# Altium PCB PCB_L0.PcbDoc (part 2 of 2)
Units mm, origin at the board's own origin, x right, y up, seen from the top; angles counter-clockwise.
Board outline 110 x 165 mm, 2 copper layers (Top Layer, Bottom Layer), stack 1.57 mm thick; 80 components, 155 nets, 574 pads, 75 vias.
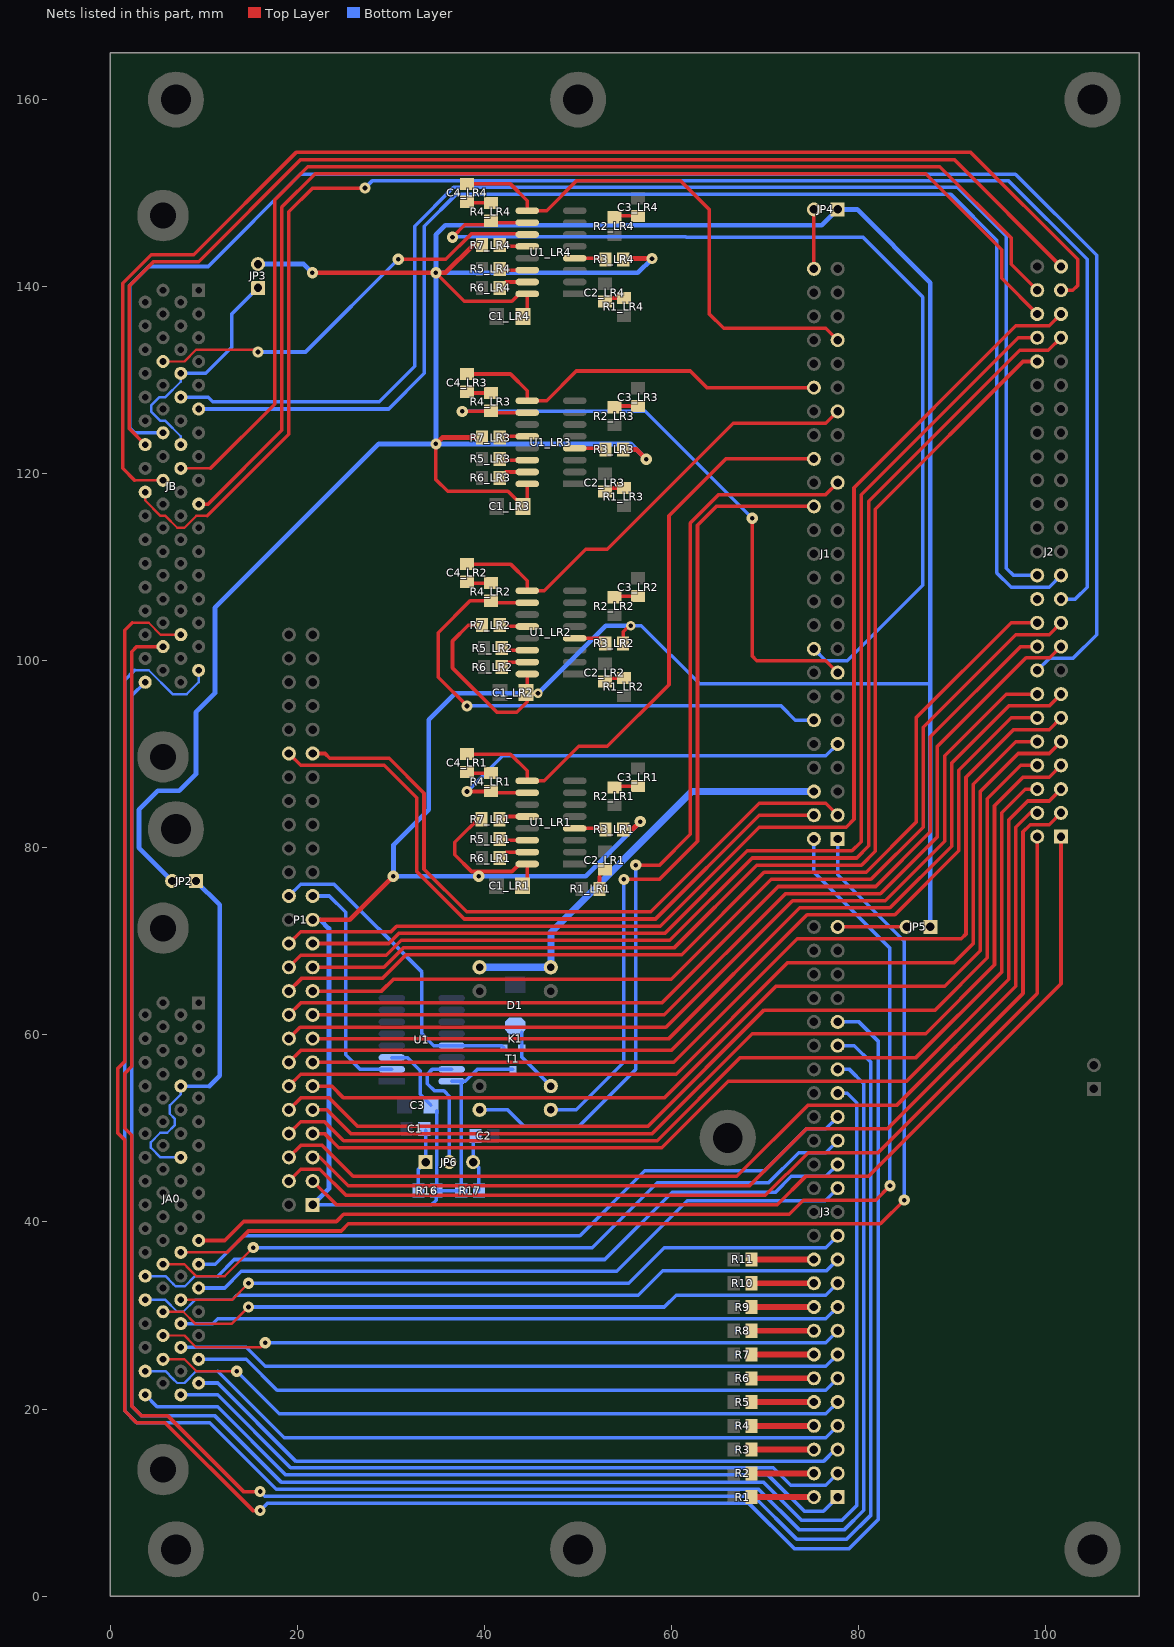
[diagram p2: the nets of this part, all layers, seen from the top]

## Via types
v1: diameter 1.2, hole 0.5, Top Layer to Bottom Layer, 71 vias
v2: diameter 1, hole 0.5, Top Layer to Bottom Layer, 2 vias
v3: diameter 1.2, hole 0.5, Top Layer to Bottom Layer, tented top, 1 vias
v4: diameter 1.2, hole 0.5, Top Layer to Bottom Layer, tented bottom, 1 vias

## Nets (pads, with @x,y where several pads share a name; then routed paths per layer and width w, separated by ;. In a path a pad name is that pad's centre, name@x,y a point inside that pad or via, vN(x,y) a via of type N, cw(c..) or ccw(c..) an arc to the next point about the centre after c; other vN are vias at no path point) (continued)
ENC_I4: JB.41 U1_LR4.11 | length 44.7
  Top Layer w0.254: JB.41@5.62,132 7.901,132 9.171,133.27 v1@15.78,133.27
  Top Layer w0.381: v1(30.766,142.922) 35.846,142.922 38.564,145.641 44.505,145.641 U1_LR4.11@44.564,145.582
  Bottom Layer w0.381: v1(15.78,133.016) 20.86,133.016 v1(30.766,142.922)
ENC_I+1: J1.9 R4_LR1.2 U1_LR1.10 | length 47.9
  Top Layer w0.381: v1(38.132,86.026) R4_LR1.2@40.606,86.026 ; R4_LR1.2@40.872,85.892 U1_LR1.10@44.564,85.892
  Bottom Layer w0.381: v1(38.132,86.026) 41.942,89.836 76.486,89.836 J1.9@77.756,91.106
ENC_I+2: J1.12 R4_LR2.2 U1_LR2.10 | length 57.6
  Top Layer w0.381: v1(38.132,95.17) 35.052,98.25 35.052,103.012 38.452,106.412 R4_LR2.2@40.672,106.412 ; R4_LR2.2@40.872,106.212 U1_LR2.10@44.564,106.212
  Bottom Layer w0.381: v1(38.132,95.17) 71.708,95.17 73.232,93.646 J1.12@75.216,93.646
ENC_I+3: J1.15 R4_LR3.2 U1_LR3.10 | length 67
  Top Layer w0.381: v1(37.624,126.666) R4_LR3.2@40.606,126.666 ; R4_LR3.2@40.872,126.532 U1_LR3.10@44.564,126.532 ; v1(68.612,115.236) 68.612,100.504 69.12,99.996 76.486,99.996 J1.15@77.756,98.726
  Bottom Layer w0.381: v1(37.624,126.666) 57.182,126.666 v1(68.612,115.236)
ENC_I+4: J1.18 R4_LR4.2 U1_LR4.10 | length 107.2
  Top Layer w0.381: v1(36.576,145.288) 37.895,146.607 R4_LR4.2@40.227,146.607 ; R4_LR4.2@40.872,146.852 U1_LR4.10@44.564,146.852
  Bottom Layer w0.381: v1@36.576,145.317 61.528,145.317 61.556,145.288 80.47,145.288 86.868,138.89 86.868,108.092 78.772,99.996 76.486,99.996 J1.18@75.216,101.266
ENC_I-1: C4_LR1.1 J1.34 U1_LR1.9 | length 63.7
  Top Layer w0.381: C4_LR1.1@38.132,90.024 42.77,90.024 44.564,88.23 U1_LR1.9@44.564,87.162 46.38,87.162 50.07,90.852 53.118,90.852 59.722,97.456 59.722,115.49 65.818,121.586 J1.34@75.216,121.586
ENC_I-2: C4_LR2.1 J1.37 U1_LR2.9 | length 49.4
  Top Layer w0.381: C4_LR2.1@38.132,110.344 42.77,110.344 44.564,108.55 U1_LR2.9@44.564,107.482 46.38,107.482 50.832,111.934 53.118,111.934 66.58,125.396 76.486,125.396 J1.37@77.756,126.666
ENC_I-3: C4_LR3.1 J1.40 U1_LR3.9 | length 40.9
  Top Layer w0.381: C4_LR3.1@38.132,130.664 42.77,130.664 44.564,128.87 U1_LR3.9@44.564,127.802 46.634,127.802 49.816,130.984 62.008,130.984 63.786,129.206 J1.40@75.216,129.206
ENC_I-4: C4_LR4.1 J1.43 U1_LR4.9 | length 56.3
  Top Layer w0.381: C4_LR4.1@38.132,150.984 42.77,150.984 44.564,149.19 U1_LR4.9@44.564,148.122 46.634,148.122 49.816,151.304 60.992,151.304 64.04,148.256 64.04,137.08 65.564,135.556 76.486,135.556 J1.43@77.756,134.286
ENDSW+_1: J2.5 P1.7 | length 106.5
  Top Layer w0.381: P1.7@21.622,49.45 22.892,49.45 24.416,47.926 58.96,47.926 66.072,55.038 85.122,55.038 96.044,65.96 96.044,82.978 98.076,85.01 100.362,85.01 J2.5@101.632,86.28
ENDSW+_2: J2.7 P1.9 | length 107.3
  Top Layer w0.381: P1.9@21.622,51.99 23.146,51.99 25.686,49.45 57.944,49.45 68.612,60.118 87.154,60.118 94.52,67.484 94.52,84.502 97.568,87.55 100.362,87.55 J2.7@101.632,88.82
ENDSW+_3: J2.9 P1.11 | length 106.3
  Top Layer w0.381: P1.11@21.622,54.53 23.654,54.53 24.924,53.26 59.214,53.26 71.152,65.198 89.186,65.198 92.996,69.008 92.996,86.026 97.06,90.09 100.362,90.09 J2.9@101.632,91.36
ENDSW+_4: J2.11 P1.13 | length 105.1
  Top Layer w0.381: P1.13@21.622,57.07 60.23,57.07 73.438,70.278 90.964,70.278 91.472,70.786 91.472,87.55 96.552,92.63 100.362,92.63 J2.11@101.632,93.9
ENDSW-_1: J2.6 P1.8 | length 106.9
  Top Layer w0.381: P1.8@19.082,49.45 20.352,50.72 22.892,50.72 24.924,48.688 58.452,48.688 67.342,57.578 86.138,57.578 95.282,66.722 95.282,83.74 97.822,86.28 J2.6@99.092,86.28
ENDSW-_2: J2.8 P1.10 | length 107.8
  Top Layer w0.381: P1.10@19.082,51.99 20.352,53.26 23.4,53.26 26.448,50.212 57.436,50.212 69.882,62.658 88.17,62.658 93.758,68.246 93.758,85.264 97.314,88.82 J2.8@99.092,88.82
ENDSW-_3: J2.10 P1.12 | length 105.2
  Top Layer w0.381: P1.12@19.082,54.53 20.352,55.8 60.484,55.8 72.422,67.738 90.202,67.738 92.234,69.77 92.234,86.788 96.806,91.36 J2.10@99.092,91.36
ENDSW-_4: J2.12 P1.14 | length 100.3
  Top Layer w0.381: P1.14@19.082,57.07 20.352,58.34 59.976,58.34 74.481,72.845 83.879,72.845 90.71,79.676 90.71,88.312 96.298,93.9 J2.12@99.092,93.9
ENSD_1: J2.17 P1.17 | length 102
  Top Layer w0.381: P1.17@21.622,62.15 59.214,62.15 72.168,75.104 82.328,75.104 88.424,81.2 88.424,90.852 97.897,100.325 100.437,100.325 J2.17@101.632,101.52
ENSD_2: J2.18 P1.18 | length 102.3
  Top Layer w0.381: P1.18@19.082,62.15 20.352,63.42 58.96,63.42 71.406,75.866 81.82,75.866 87.662,81.708 87.662,91.868 97.314,101.52 J2.18@99.092,101.52
ENSD_3: J2.19 P1.19 | length 102.6
  Top Layer w0.381: P1.19@21.622,64.69 28.988,64.69 30.258,65.96 59.976,65.96 70.644,76.628 81.312,76.628 86.9,82.216 86.9,92.884 96.806,102.79 100.362,102.79 J2.19@101.632,104.06
ENSD_4: J2.20 P1.20 | length 102.9
  Top Layer w0.381: P1.20@19.082,64.69 20.427,66.035 29.063,66.035 31.608,68.58 61.072,68.58 69.882,77.39 80.804,77.39 86.138,82.724 86.138,93.9 96.298,104.06 J2.20@99.092,104.06
FX: J3.1 JA0.68 | length 79.8
  Bottom Layer w0.381: JA0.68@3.715,21.51 4.985,20.24 11.462,20.24 18.748,12.954 70.31,12.954 74.2,9.064 76.232,9.064 J3.1@77.756,10.588
FY: J3.5 JA0.33 | length 72.3
  Bottom Layer w0.381: JA0.33@9.43,22.78 11.462,22.78 19.844,14.398 76.232,14.398 77.502,15.668 J3.5@77.756,15.668
FZ: J3.9 JA0.65 | length 75.1
  Top Layer w0.254: JA0.65@5.62,25.32 7.901,25.32 9.171,24.05 v1(13.494,24.05)
  Bottom Layer w0.381: v1(13.494,24.05) 18.066,19.478 76.486,19.478 J3.9@77.756,20.748
GRIPPER_CLOSE: J2.14 P1.16 | length 100.6
  Top Layer w0.381: P1.16@19.082,59.61 20.276,60.805 59.392,60.805 72.93,74.342 82.836,74.342 89.186,80.692 89.186,89.836 95.79,96.44 J2.14@99.092,96.44
GRIPPER_OPEN: J2.13 P1.15 | length 100.5
  Top Layer w0.381: P1.15@21.622,59.61 59.722,59.61 73.692,73.58 83.344,73.58 89.948,80.184 89.948,89.074 96.044,95.17 100.362,95.17 J2.13@101.632,96.44
HAL1: J3.35 JB.68 | length 206.7
  Bottom Layer w0.381: JB.68@3.715,97.71 2.286,96.281 2.286,20.32 3.302,19.304 11.128,19.304 18.24,12.192 69.802,12.192 73.866,8.128 78.232,8.128 79.788,9.684 79.788,52.752 78.772,53.768 J3.35@77.756,53.768
HAL2: J3.37 JB.33 | length 223.5
  Bottom Layer w0.254: 2.572,98.98 4.091,98.98 6.631,96.44 8.16,96.44 9.43,97.71 JB.33@9.43,98.98
  Bottom Layer w0.381: 2.572,98.98 1.524,97.932 1.524,19.812 2.794,18.542 10.62,18.542 17.732,11.43 69.294,11.43 73.612,7.112 78.486,7.112 80.55,9.176 80.55,54.784 79.026,56.308 J3.37@77.756,56.308
HAL3: J3.39 JB.65 | length 223.5
  Top Layer w0.381: JB.65@5.62,101.52 2.826,101.52 2.286,100.98 2.286,56.642 1.524,55.88 1.524,50.038 2.286,49.276 2.286,20.32 3.302,19.304 6.096,19.304 14.224,11.176 v1(16.002,11.176)
  Bottom Layer w0.381: v1(16.002,11.176) 16.51,10.668 68.786,10.668 73.358,6.096 78.74,6.096 81.312,8.668 81.312,57.07 79.534,58.848 J3.39@77.756,58.848
HAL4: J3.41 JB.30 | length 235.9
  Top Layer w0.254: 2.318,104.06 4.091,104.06 5.361,102.79 JB.30@7.525,102.79
  Top Layer w0.381: 2.318,104.06 1.524,103.266 1.524,57.15 0.762,56.388 0.762,49.53 1.524,48.768 1.524,19.812 2.794,18.542 5.842,18.542 15.24,9.144 v1(16.002,9.144)
  Bottom Layer w0.381: v1(16.002,9.144) 16.764,9.906 68.278,9.906 73.104,5.08 78.994,5.08 82.074,8.16 82.074,59.356 80.042,61.388 J3.41@77.756,61.388
NetC1_2: C1.2 JP6.1 R16.1 | length 6.8
  Bottom Layer w0.381: R16.1@32.93,43.354 32.93,45.64 JP6.1@33.692,46.402 C1.2@33.692,49.826
NetC2_2: C2.2 JP6.3 R17.1 | length 5.6
  Bottom Layer w0.381: C2.2@38.772,48.688 JP6.3@38.772,46.402 39.402,45.772 R17.1@39.402,43.354
NetC2_LR1_2: C2_LR1.2 R1_LR1.1 | length 1.5
  Top Layer w0.381: R1_LR1.1@52.29,75.358 52.29,76.882
NetC2_LR2_2: C2_LR2.2 R1_LR2.1 | length 1.7
  Top Layer w0.381: C2_LR2.2@53.24,98.152 R1_LR2.1@54.896,98.152
NetC2_LR3_2: C2_LR3.2 R1_LR3.1 | length 1.7
  Top Layer w0.381: C2_LR3.2@53.24,118.472 R1_LR3.1@54.896,118.472
NetC2_LR4_2: C2_LR4.2 R1_LR4.1 | length 1.7
  Top Layer w0.381: C2_LR4.2@53.24,138.792 R1_LR4.1@54.896,138.792
NetC3_LR1_2: C3_LR1.2 R2_LR1.1 | length 2.4
  Top Layer w0.381: R2_LR1.1@54.012,86.6 C3_LR1.2@56.42,86.6
NetC3_LR2_2: C3_LR2.2 R2_LR2.1 | length 2.4
  Top Layer w0.381: R2_LR2.1@54.012,106.92 C3_LR2.2@56.42,106.92
NetC3_LR3_2: C3_LR3.2 R2_LR3.1 | length 2.4
  Top Layer w0.381: R2_LR3.1@54.012,127.24 C3_LR3.2@56.42,127.24
NetC3_LR4_2: C3_LR4.2 R2_LR4.1 | length 2.4
  Top Layer w0.381: R2_LR4.1@54.012,147.56 C3_LR4.2@56.42,147.56
NetC4_LR1_2: C4_LR1.2 R4_LR1.1 | length 2.4
  Top Layer w0.381: C4_LR1.2@38.264,87.992 R4_LR1.1@40.672,87.992
NetC4_LR2_2: C4_LR2.2 R4_LR2.1 | length 2.4
  Top Layer w0.381: C4_LR2.2@38.264,108.312 R4_LR2.1@40.672,108.312
NetC4_LR3_2: C4_LR3.2 R4_LR3.1 | length 2.4
  Top Layer w0.381: C4_LR3.2@38.264,128.632 R4_LR3.1@40.672,128.632
NetC4_LR4_2: C4_LR4.2 R4_LR4.1 | length 2.4
  Top Layer w0.381: C4_LR4.2@38.264,148.952 R4_LR4.1@40.672,148.952
NetD1_1: D1.1 K1.2 T1.2 | length 7
  Bottom Layer w0.381: D1.1@43.977,60.267 T1.2@43.977,58.598 43.977,57.641 K1.2@47.088,54.53
NetJ1_50: J1.50 JP4.2 | length 6.3
  Top Layer w0.381: J1.50@75.216,141.906 JP4.2@75.216,148.256
NetJ3_2: J3.2 R1.1 | length 6.7
  Top Layer w0.635: R1.1@68.546,10.588 J3.2@75.216,10.588
NetJ3_4: J3.4 R2.1 | length 6.7
  Top Layer w0.635: R2.1@68.546,13.128 J3.4@75.216,13.128
NetJ3_6: J3.6 R3.1 | length 6.7
  Top Layer w0.635: R3.1@68.546,15.668 J3.6@75.216,15.668
NetJ3_8: J3.8 R4.1 | length 6.7
  Top Layer w0.635: R4.1@68.546,18.208 J3.8@75.216,18.208
NetJ3_10: J3.10 R5.1 | length 6.7
  Top Layer w0.635: R5.1@68.546,20.748 J3.10@75.216,20.748
NetJ3_12: J3.12 R6.1 | length 6.7
  Top Layer w0.635: R6.1@68.546,23.288 J3.12@75.216,23.288
NetJ3_14: J3.14 R7.1 | length 6.7
  Top Layer w0.635: R7.1@68.546,25.828 J3.14@75.216,25.828
NetJ3_16: J3.16 R8.1 | length 6.7
  Top Layer w0.635: R8.1@68.546,28.368 J3.16@75.216,28.368
NetJ3_18: J3.18 R9.1 | length 6.7
  Top Layer w0.635: R9.1@68.546,30.908 J3.18@75.216,30.908
NetJ3_20: J3.20 R10.1 | length 6.7
  Top Layer w0.635: R10.1@68.546,33.448 J3.20@75.216,33.448
NetJ3_22: J3.22 R11.1 | length 6.7
  Top Layer w0.635: R11.1@68.546,35.988 J3.22@75.216,35.988
NetJ3_49: J3.49 JP5.2 | length 7.4
  Top Layer w0.381: J3.49@77.756,71.548 JP5.2@85.122,71.548
NetJA0_8: JA0.8 JA0.14 JP2.1 | length 38.9
  Bottom Layer w0.254: JA0.14@7.525,46.91 5.361,46.91 4.318,47.953 4.318,48.514 5.334,49.53 6.076,49.53 6.858,50.312 6.858,51.054 6.35,51.562 6.35,52.461 7.525,53.636 JA0.8@7.525,54.53
  Bottom Layer w0.381: JA0.8@7.525,54.53 10.588,54.53
  Bottom Layer w0.508: JP2.1@9.144,76.454 11.684,73.914 11.684,55.626 10.588,54.53
NetJB_8: JB.8 JB.14 JP3.1 | length 25.1
  Bottom Layer w0.254: JB.14@7.525,123.11 7.525,124.004 5.879,125.65 5.361,125.65 4.35,126.661 4.35,127.296 5.244,128.19 5.879,128.19 7.525,129.836 JB.8@7.525,130.73
  Bottom Layer w0.381: JB.8@7.525,130.73 10.192,130.73 12.986,133.524 12.986,137.08 JP3.1@15.78,139.874
NetJP6_2: JP6.2 U1.15 | length 13.8
  Bottom Layer w0.381: JP6.2@36.232,46.402 36.232,53.448 35.658,54.022 34.642,54.022 33.88,54.784 33.88,55.8 34.388,56.308 U1.15@36.486,56.308
NetR3_LR1_1: R3_LR1.1 U1_LR1.4 | length 3.2
  Top Layer w0.381: U1_LR1.4@49.644,82.082 R3_LR1.1@52.81,82.082
NetR3_LR2_1: R3_LR2.1 U1_LR2.4 | length 3.2
  Top Layer w0.381: U1_LR2.4@49.644,102.402 R3_LR2.1@52.81,102.402
NetR3_LR3_1: R3_LR3.1 U1_LR3.4 | length 3.2
  Top Layer w0.381: U1_LR3.4@49.644,122.722 R3_LR3.1@52.81,122.722
NetR3_LR4_1: R3_LR4.1 U1_LR4.4 | length 3.2
  Top Layer w0.381: U1_LR4.4@49.644,143.042 R3_LR4.1@52.81,143.042
NetR5_LR1_1: R5_LR1.1 U1_LR1.14 | length 2.7
  Top Layer w0.381: R5_LR1.1@41.822,80.812 U1_LR1.14@44.564,80.812
NetR5_LR2_1: R5_LR2.1 U1_LR2.14 | length 2.7
  Top Layer w0.381: R5_LR2.1@41.822,101.132 U1_LR2.14@44.564,101.132
NetR5_LR3_1: R5_LR3.1 U1_LR3.14 | length 2.7
  Top Layer w0.381: R5_LR3.1@41.822,121.452 U1_LR3.14@44.564,121.452
NetR5_LR4_1: R5_LR4.1 U1_LR4.14 | length 2.7
  Top Layer w0.381: R5_LR4.1@41.822,141.772 U1_LR4.14@44.564,141.772
NetR6_LR1_1: R6_LR1.1 U1_LR1.15 | length 2.3
  Top Layer w0.381: R6_LR1.1@42.25,79.542 U1_LR1.15@44.564,79.542
NetR6_LR2_1: R6_LR2.1 U1_LR2.15 | length 2.3
  Top Layer w0.381: R6_LR2.1@42.25,99.862 U1_LR2.15@44.564,99.862
NetR6_LR3_1: R6_LR3.1 U1_LR3.15 | length 2.3
  Top Layer w0.381: R6_LR3.1@42.25,120.182 U1_LR3.15@44.564,120.182
NetR6_LR4_1: R6_LR4.1 U1_LR4.15 | length 2.3
  Top Layer w0.381: R6_LR4.1@42.25,140.502 U1_LR4.15@44.564,140.502
NetR7_LR1_1: R7_LR1.1 U1_LR1.12 | length 2.8
  Top Layer w0.381: R7_LR1.1@41.756,83.352 U1_LR1.12@44.564,83.352
NetR7_LR2_1: R7_LR2.1 U1_LR2.12 | length 2.8
  Top Layer w0.381: R7_LR2.1@41.756,103.672 U1_LR2.12@44.564,103.672
NetR7_LR3_1: R7_LR3.1 U1_LR3.12 | length 2.8
  Top Layer w0.381: R7_LR3.1@41.756,123.992 U1_LR3.12@44.564,123.992
NetR7_LR4_1: R7_LR4.1 U1_LR4.12 | length 2.8
  Top Layer w0.381: R7_LR4.1@41.756,144.312 U1_LR4.12@44.564,144.312
RAI_A1: J3.27 JA0.25 | length 72.7
  Bottom Layer w0.381: JA0.25@9.43,32.94 12.224,32.94 14.002,34.718 54.134,34.718 61.678,42.263 76.41,42.263 J3.27@77.756,43.608
RAI_A2: J3.31 JA0.57 | length 78.7
  Top Layer w0.254: JA0.57@5.62,35.48 7.906,35.48 8.349,35.037 8.349,35.032 8.982,34.399 8.987,34.399 9.176,34.21 12.224,34.21 v1(15.272,37.258)
  Bottom Layer w0.381: v1(15.272,37.258) 51.53,37.258 58.468,44.196 70.358,44.196 73.58,47.418 76.486,47.418 J3.31@77.756,48.688
RAI_A3: J3.3 JA0.34 | length 74.8
  Bottom Layer w0.381: JA0.34@7.525,21.51 11.462,21.51 19.256,13.716 70.866,13.716 72.724,11.858 76.486,11.858 J3.3@77.756,13.128
RAI_A4: J3.7 JA0.66 | length 78.6
  Bottom Layer w0.254: JA0.66@3.715,24.05 5.879,24.05 6.701,23.228 6.701,23.223 7.144,22.78 7.901,22.78 9.176,24.055 11.462,24.055
  Bottom Layer w0.381: 11.462,24.05 18.574,16.938 76.486,16.938 J3.7@77.756,18.208
RAI_A5: J3.11 JA0.31 | length 70.2
  Bottom Layer w0.381: JA0.31@9.43,25.32 14.51,25.32 17.812,22.018 76.486,22.018 J3.11@77.756,23.288
RAI_A6: J3.15 JA0.63 | length 73.4
  Top Layer w0.254: JA0.63@5.62,27.86 7.906,27.86 8.349,27.417 8.349,27.412 9.171,26.59 16.034,26.59 v1(16.542,27.098)
  Bottom Layer w0.381: v1(16.542,27.098) 76.486,27.098 J3.15@77.756,28.368
RAI_A7: J3.19 JA0.61 | length 74.5
  Top Layer w0.254: JA0.61@5.62,30.4 7.784,30.4 9.054,29.13 12.986,29.13 v1(14.764,30.908)
  Bottom Layer w0.381: v1(14.764,30.908) 59.214,30.908 60.484,32.178 76.486,32.178 J3.19@77.756,33.448
RAI_A8: J3.23 JA0.26 | length 73.1
  Top Layer w0.254: JA0.26@7.525,31.67 12.986,31.67 v1(14.764,33.448)
  Bottom Layer w0.381: v1(14.764,33.448) 55.404,33.448 59.214,37.258 76.486,37.258 J3.23@77.756,38.528
RAI_A9: J3.29 JA0.58 | length 79.9
  Bottom Layer w0.254: JA0.58@3.715,34.21 5.879,34.21 6.701,33.388 6.701,33.383 6.955,33.129 7.973,33.129 9.054,34.21 11.462,34.21
  Bottom Layer w0.381: 11.462,34.21 13.24,35.988 52.864,35.988 60.056,43.18 71.105,43.18 72.803,44.878 76.486,44.878 J3.29@77.756,46.148
RAI_A10: J3.33 JA0.23 | length 74.8
  Bottom Layer w0.381: JA0.23@9.43,35.48 11.208,35.48 14.256,38.528 50.197,38.528 57.135,45.466 69.93,45.466 74.422,49.958 76.486,49.958 J3.33@77.756,51.228
RDI_1: J2.47 JB.51 | length 142.1
  Top Layer w0.254: 2.572,119.3 JB.51@5.62,119.3
  Top Layer w0.381: 2.572,119.3 1.302,120.57 1.302,140.382 4.35,143.43 8.922,143.43 19.844,154.352 91.98,154.352 103.41,142.922 103.41,140.128 102.902,139.62 J2.47@101.632,139.62
RDI_2: J2.48 JB.16 | length 124.8
  Top Layer w0.254: JB.16@7.525,120.57 10.7,120.57
  Top Layer w0.381: 10.7,120.57 17.558,127.428 17.558,149.272 21.114,152.828 88.678,152.828 96.298,145.208 96.298,142.414 J2.48@99.092,139.62
RDI_3: J2.49 JB.48 | length 127.6
  Top Layer w0.381: JB.48@3.715,123.11 2.032,124.793 2.032,140.096 4.604,142.668 9.43,142.668 20.352,153.59 90.202,153.59 J2.49@101.632,142.16
RDO_1: J2.21 JB.52 | length 173.9
  Top Layer w0.254: JB.52@3.715,118.03 3.715,117.136 5.361,115.49 5.879,115.49 7.149,114.22 7.901,114.22 9.171,115.49 10.334,115.49
  Top Layer w0.381: 10.334,115.49 19.082,124.238 19.082,148.002 21.622,150.542 v1(27.21,150.542)
  Bottom Layer w0.381: v1(27.21,150.542) 27.972,151.304 96.044,151.304 104.426,142.922 104.426,107.87 103.156,106.6 J2.21@101.632,106.6
RDO_2: J2.22
RDO_3: J2.23 JB.11 | length 149.7
  Bottom Layer w0.381: JB.11@9.43,126.92 29.75,126.92 33.56,130.73 33.56,146.478 36.942,149.86 89.868,149.86 94.774,144.954 94.774,109.394 96.298,107.87 100.362,107.87 J2.23@101.632,109.14
RDO_4: J2.24 JB.10 | length 148
  Bottom Layer w0.381: JB.10@7.525,128.19 10.446,128.19 10.954,127.682 28.734,127.682 32.544,131.492 32.544,146.478 36.688,150.622 90.543,150.622 95.79,145.375 95.79,109.902 96.552,109.14 J2.24@99.092,109.14
READY_1: J2.1 P1.3 | length 106.6
  Top Layer w0.381: P1.3@21.622,44.37 24.162,41.83 71.294,41.83 74.371,44.907 81.087,44.907 101.632,65.452 J2.1@101.632,81.2
READY_2: J2.2 P1.4 | length 107.4
  Top Layer w0.381: P1.4@19.082,44.37 20.352,45.64 22.384,45.64 25.178,42.846 70.024,42.846 74.596,47.418 82.074,47.418 99.092,64.436 J2.2@99.092,81.2
READY_3: J2.3 P1.5 | length 107.9
  Top Layer w0.381: P1.5@21.622,46.91 22.366,46.91 25.414,43.862 68.326,43.862 74.422,49.958 83.09,49.958 97.568,64.436 97.568,81.708 98.33,82.47 100.362,82.47 J2.3@101.632,83.74
READY_4: J2.4 P1.6 | length 108
  Top Layer w0.381: P1.6@19.082,46.91 20.352,48.18 22.638,48.18 25.94,44.878 66.976,44.878 74.596,52.498 84.106,52.498 96.806,65.198 96.806,82.216 98.33,83.74 J2.4@99.092,83.74
ROD: J2.46 JB.19 | length 126.5
  Top Layer w0.381: JB.19@9.43,116.76 10.446,116.76 18.32,124.634 18.32,148.51 21.888,152.078 79.267,152.078 79.28,152.066 ; 79.026,152.066 79.28,152.066 ; J2.46@99.092,137.08 95.282,140.89 95.282,143.938 87.154,152.066 79.28,152.066
SDCC_1: J2.42 P1.21 | length 125.7
  Top Layer w0.381: P1.21@21.622,67.23 29.242,67.23 31.354,69.342 60.31,69.342 69.12,78.152 80.296,78.152 81.788,79.644 81.788,116.22 97.568,132 J2.42@99.092,132
SDCC_2: J2.43 P1.22 | length 132
  Top Layer w0.381: P1.22@19.082,67.23 20.352,68.5 29.496,68.5 31.1,70.104 59.802,70.104 68.612,78.914 79.788,78.914 81.086,80.212 81.086,117.042 97.238,133.195 100.286,133.195 J2.43@101.632,134.54
SDCC_3: J2.44 P1.23 | length 126
  Top Layer w0.381: P1.23@21.622,69.77 29.75,69.77 30.846,70.866 59.294,70.866 68.104,79.676 79.28,79.676 80.264,80.66 80.264,117.744 97.06,134.54 J2.44@99.092,134.54
SDCC_4: J2.45 P1.24 | length 131.2
  Top Layer w0.381: P1.24@19.082,69.77 20.352,71.04 30.004,71.04 30.592,71.628 58.786,71.628 69.374,82.216 78.66,82.216 79.502,83.058 79.502,118.506 96.806,135.81 100.362,135.81 J2.45@101.632,137.08
SETVAL1: J1.1 JA0.22 | length 121.2
  Top Layer w0.254: JA0.22@7.525,36.75 12.478,36.75
  Top Layer w0.381: 12.478,36.75 14.764,39.036 24.67,39.036 25.432,39.798 82.328,39.798 v1(84.868,42.338)
  Bottom Layer w0.381: J1.1@77.756,80.946 77.756,77.136 84.868,70.024 v1(84.868,42.338)
SETVAL2: J1.2 JA0.21 | length 116.8
  Top Layer w0.381: JA0.21@9.43,38.02 12.224,38.02 14.256,40.052 24.162,40.052 24.924,40.814 72.564,40.814 74.088,42.338 81.82,42.338 v1(83.344,43.862)
  Bottom Layer w0.381: J1.2@75.216,80.946 75.216,77.39 83.344,69.262 v1(83.344,43.862)
SETVAL3: J1.3 P1.39 | length 73.2
  Top Layer w0.381: P1.39@21.622,90.09 22.94,90.09 23.456,89.574 29.806,89.574 33.528,85.852 33.528,77.724 38.1,73.152 57.77,73.152 69.374,84.756 76.486,84.756 J1.3@77.756,83.486
SETVAL4: J1.4 P1.40 | length 72.7
  Top Layer w0.381: P1.40@19.082,90.09 20.352,88.82 29.29,88.82 32.766,85.344 32.766,77.47 37.846,72.39 58.278,72.39 69.374,83.486 J1.4@75.216,83.486
TX: J3.13 JA0.30 | length 71.6
  Bottom Layer w0.381: JA0.30@7.525,26.59 14.51,26.59 16.542,24.558 76.486,24.558 J3.13@77.756,25.828
TY: J3.17 JA0.28 | length 71
  Bottom Layer w0.381: JA0.28@7.525,29.13 10.954,29.13 11.462,29.638 76.486,29.638 J3.17@77.756,30.908
TZ: J3.21 JA0.60 | length 76.8
  Bottom Layer w0.254: JA0.60@3.715,31.67 5.879,31.67 7.149,30.4 7.784,30.4 9.054,31.67 12.986,31.67 13.494,32.178
  Bottom Layer w0.381: 13.569,32.178 56.42,32.178 59.035,34.793 76.561,34.793 J3.21@77.756,35.988
VACUUM: J2.16 JB.47 | length 179.4
  Bottom Layer w0.381: JB.47@5.62,124.38 2.572,124.38 2.064,124.888 2.064,140.128 4.096,142.16 10.446,142.16 20.308,152.022 96.762,152.022 105.442,143.343 105.442,102.79 102.902,100.25 100.362,100.25 J2.16@99.092,98.98
VCC: C1_LR1.2 C1_LR2.2 C1_LR3.2 C1_LR4.2 C3.2 JP2.2 JP3.2 JP4.1 JP5.1 P1.1 P1.25 R3_LR1.2 R3_LR2.2 R3_LR3.2 R3_LR4.2 R7_LR1.2 R7_LR2.2 R7_LR3.2 R7_LR4.2 R16.2 R17.2 T1.3 U1.3 U1.16 U1_LR1.16 U1_LR2.16 U1_LR3.16 U1_LR4.16 | length 570.2
  Top Layer w0.381: v1(34.798,123.19) 34.798,119.38 36.068,118.11 42.5,118.11 C1_LR3.2@44.104,116.506 ; v4(34.798,141.478) 37.846,138.43 42.926,138.43 U1_LR4.16@43.728,139.232 ; R7_LR1.2@39.722,83.486 36.83,80.594 36.83,79.248 38.608,77.47 42.926,77.47 U1_LR1.16@43.728,78.272 ; R7_LR2.2@39.722,103.806 38.274,103.806 36.576,102.108 36.576,99.234 41.322,94.488 43.434,94.488 44.564,95.618 U1_LR2.16@44.564,98.592 ; C1_LR1.2@44.564,76.326 U1_LR1.16@44.564,78.272 ; C1_LR3.2@44.564,116.966 U1_LR3.16@44.564,118.912 ; C1_LR4.2@44.564,137.286 U1_LR4.16@44.564,139.232 ; C1_LR2.2@44.69,96.52 v2(45.72,96.52) ; R3_LR2.2@54.83,102.282 54.83,103.09 55.562,103.822 v2(55.626,103.759)
  Top Layer w0.508: v1(21.59,141.478) v4(34.798,141.478) 35.814,141.478 38.782,144.446 R7_LR4.2@39.722,144.446 ; P1.25@21.622,72.31 25.574,72.31 v1(30.226,76.962) ; v1(34.798,123.19) 35.48,123.872 R7_LR3.2@39.722,123.872 ; R3_LR1.2@54.83,81.962 55.8,81.962 v1(56.642,82.804) ; R3_LR3.2@54.83,122.602 56.214,122.602 v1(57.277,121.539) ; R3_LR4.2@54.91,143.002 v1(57.912,143.002)
  Bottom Layer w0.381: P1.1@21.622,41.83 34.322,41.83 34.83,42.338 R16.2@34.83,43.354 ; U1.3@30.085,57.578 31.724,57.578 33.118,56.184 33.118,53.644 C3.2@34.264,52.498 ; C3.2@34.887,51.875 34.887,43.411 R16.2@34.83,43.354 ; U1.16@36.486,55.038 37.944,55.038 39.214,56.308 T1.3@43.024,56.308 ; U1.16@37.502,54.972 R17.2@37.502,43.354 R16.2@34.83,43.354 ; v2@55.626,103.886 v2(55.626,103.759) 56.769,103.759 62.997,97.531 87.63,97.531
  Bottom Layer w0.508: JP2.2@6.604,76.454 3.048,80.01 3.048,84.074 5.08,86.106 7.366,86.106 9.144,87.884 9.144,94.488 11.176,96.52 11.176,105.664 28.702,123.19 v1(34.798,123.19) ; JP3.2@15.78,142.414 20.654,142.414 v1(21.59,141.478) ; P1.1@21.622,41.83 23.368,43.576 23.368,71.374 22.432,72.31 P1.25@21.622,72.31 ; v2(55.626,103.759) 52.959,103.759 v2(45.72,96.52) 36.878,96.52 34.036,93.678 34.036,84.074 30.258,80.296 30.258,76.962 v1(39.37,76.962) 50.8,76.962 v1(56.642,82.804) ; v1(57.277,121.539) 55.626,123.19 v1(34.798,123.19) ; v1(57.912,143.002) 56.388,141.478 v4(34.798,141.478) ; JP5.1@87.662,71.548 87.662,140.43 79.836,148.256 JP4.1@77.756,148.256 76.058,146.558 35.814,146.558 34.798,145.542 v4(34.798,141.478) ; v1(34.798,123.19) v4(34.798,141.478)
WD: P1.27 U1.2 | length 25.1
  Bottom Layer w0.381: P1.27@21.622,74.85 23.4,74.85 25.146,73.104 25.146,57.864 26.702,56.308 U1.2@30.085,56.308
WD_COM: J1.6 K1.7 K1.8 | length 45.7
  Bottom Layer w0.762: K1.8@39.468,67.23 K1.7@47.088,67.23 47.088,70.964 62.15,86.026 J1.6@75.216,86.026
WD_NC: J1.30 K1.1 | length 86.1
  Top Layer w0.381: v1(54.896,76.628) 58.706,76.628 62.77,80.692 62.77,114.474 64.802,116.506 J1.30@75.216,116.506
  Bottom Layer w0.381: K1.1@47.088,51.99 49.816,51.99 54.896,57.07 v1(54.896,76.628)
WD_NO: J1.31 K1.14 | length 99.8
  Top Layer w0.381: v1(56.166,78.152) 58.706,78.152 62.008,81.454 62.008,114.728 65.056,117.776 76.486,117.776 J1.31@77.756,119.046
  Bottom Layer w0.381: K1.14@39.468,51.99 42.45,51.99 44.228,50.212 50.07,50.212 56.166,56.308 v1(56.166,78.152)
WD_STATUS: P1.28 T1.1 U1.13 | length 34.6
  Bottom Layer w0.381: P1.28@19.082,74.85 20.352,76.12 23.908,76.12 33.306,66.722 33.306,60.118 34.576,58.848 U1.13@36.486,58.848 41.821,58.848 T1.1@42.071,58.598
pads on no net: J2.26 J2.27 J2.28 J2.29 J2.30 J2.31 J2.32 J2.33 J2.34 J2.35 J2.36 J2.37 J2.38 J2.39 J2.40 J2.41 J3.25 J3.26 J3.28 J3.30 J3.32 J3.34 J3.38 J3.40 J3.42 J3.43 J3.44 J3.45 J3.46 J3.47 J3.48 J3.50 JA0. JA0.1 JA0.2 JA0.5 JA0.6 JA0.10 JA0.11 JA0.20 JA0.38 JA0.39 JA0.40 JA0.43 JA0.62 JB. JB.1 JB.2 JB.5 JB.6 JB.17 JB.20 JB.21 JB.22 JB.23 JB.25 JB.26 JB.28 JB.31 JB.34 JB.38 JB.39 JB.40 JB.43 JB.54 JB.55 JB.57 JB.58 JB.60 JB.61 JB.62 JB.63 JB.66 K1.9 K1.13 P1.41 P1.42 P1.43 P1.44 P1.45 P1.46 P1.47 P1.48 U1.4 U1.5 U1.6 U1.7 U1.12 U1_LR1.13 U1_LR2.13 U1_LR3.13 U1_LR4.13
copper on no net: | length 78.7
  Top Layer w0.254: 26.67,16.51 54.61,16.51 54.61,27.94 26.67,27.94 26.67,16.51

## Polygon pours and split planes (outlines as drawn)
AGND on Top Layer "Top Layer-AGND" (solid, remove dead copper, pour order 10): 0,0 110,0 110,55 60,55 45,40 0,40
AGND on Top Layer "Top Layer-AGND 2" (solid, remove dead copper, pour order 20): 0,96 24,96 24,105 17,105 12,110 12,114 0,114
DGND on Top Layer "Top Layer-DGND" (solid, remove dead copper, pour order 24): 0,40 0,96 24,96 24,105 23.919,105.081 16.919,105.081 12.027,109.973 12,110 12,114 0,114 0,165 110,165 110,55 60,55 45,40
AGND on Bottom Layer "Bottom Layer-AGND 2" (solid, remove dead copper, pour order 16): 0,114 12,114 12,110 17,105 24,105 24,96 0,96
AGND on Bottom Layer "Bottom Layer-AGND" (solid, remove dead copper, pour order 8): 0,0 110,0 110,55 60,55 46,41 45,40 0,40
DGND on Bottom Layer "Bottom Layer-DGND" (solid, remove dead copper, pour order 18): 110,55 60,55 45,40 0,40 0,96 24,96 24,105 17,105 12,110 12,114 0,114 0,165 110,165

## Keep-outs
Keep-Out Layer:
  lines w0.254: 0,0 0,165.1 110,165.1 110,0 0,0

## Other copper
Top Layer:
  text "Adapter for SCARA" at 27.94,25.4 h1.52
  text "Lower Board" at 27.94,22.86 h1.52
  text "Revision 0.1" at 27.94,20.32 h1.52
  text "2012-12-12 mzueger" at 27.94,17.78 h1.52

## Silkscreen, mask and mechanical layers (free items; w line width, h text height)
Mechanical 1:
  lines w0: 0,0 0,165.1 110,165.1 110,0 0,0

## Dimensions
110.254,0 to 105,160 on Mechanical 13
110.254,0 to 66,49 on Mechanical 13
0,0 to 105,5 on Mechanical 13
0,0 to 50,5 on Mechanical 13
0,0 to 66,49 on Mechanical 13
110,0 to 110,165 on Mechanical 13
0,0 to 7,82 on Mechanical 13
110,0 to 105,5 on Mechanical 13
0,0 to 7,5 on Mechanical 13
0,0 to 110,0 on Mechanical 13

## Text inside footprints (layer, text, board x,y; h text height)
J1: Top Overlay "50" at 73.946,141.906 h1.27 r90; Top Overlay "49" at 80.296,141.906 h1.27 r90; Top Overlay "1" at 80.296,79.041 h1.27 r90; Top Overlay "2" at 73.946,79.041 h1.27 r90
J2: Top Overlay "50" at 97.822,142.16 h1.27 r90; Top Overlay "49" at 104.172,142.16 h1.27 r90; Top Overlay "1" at 104.172,79.295 h1.27 r90; Top Overlay "2" at 97.822,79.295 h1.27 r90
J3: Top Overlay "50" at 73.946,71.548 h1.27 r90; Top Overlay "49" at 80.296,71.548 h1.27 r90; Top Overlay "1" at 80.296,8.683 h1.27 r90; Top Overlay "2" at 73.946,8.683 h1.27 r90
JA0: Top Overlay "35" at 2.445,65.96 h1.5 r270; Top Overlay "68" at 2.445,20.24 h1.5 r270; Top Overlay "34" at 9.43,20.875 h1.5 r270; Top Overlay "1" at 8.795,65.96 h1.5 r270
JB: Top Overlay "35" at 2.445,142.16 h1.5 r270; Top Overlay "68" at 2.445,96.44 h1.5 r270; Top Overlay "34" at 9.43,97.075 h1.5 r270; Top Overlay "1" at 8.795,142.16 h1.5 r270
P1: Top Overlay "2" at 19.59,39.29 h1.27 r90; Top Overlay "1" at 22.13,39.29 h1.27 r90; Top Overlay "49" at 22.13,104.822 h1.27 r90; Top Overlay "50" at 19.59,104.822 h1.27 r90